# Altium PCB RevolvingStageController.PcbDoc
Units mil, origin at the board's own origin, x right, y up, seen from the top; angles counter-clockwise.
Board outline 2766.03 x 2766.03 mil, 2 copper layers (Top Layer, Bottom Layer); 41 components, 32 nets, 182 pads, 22 vias.
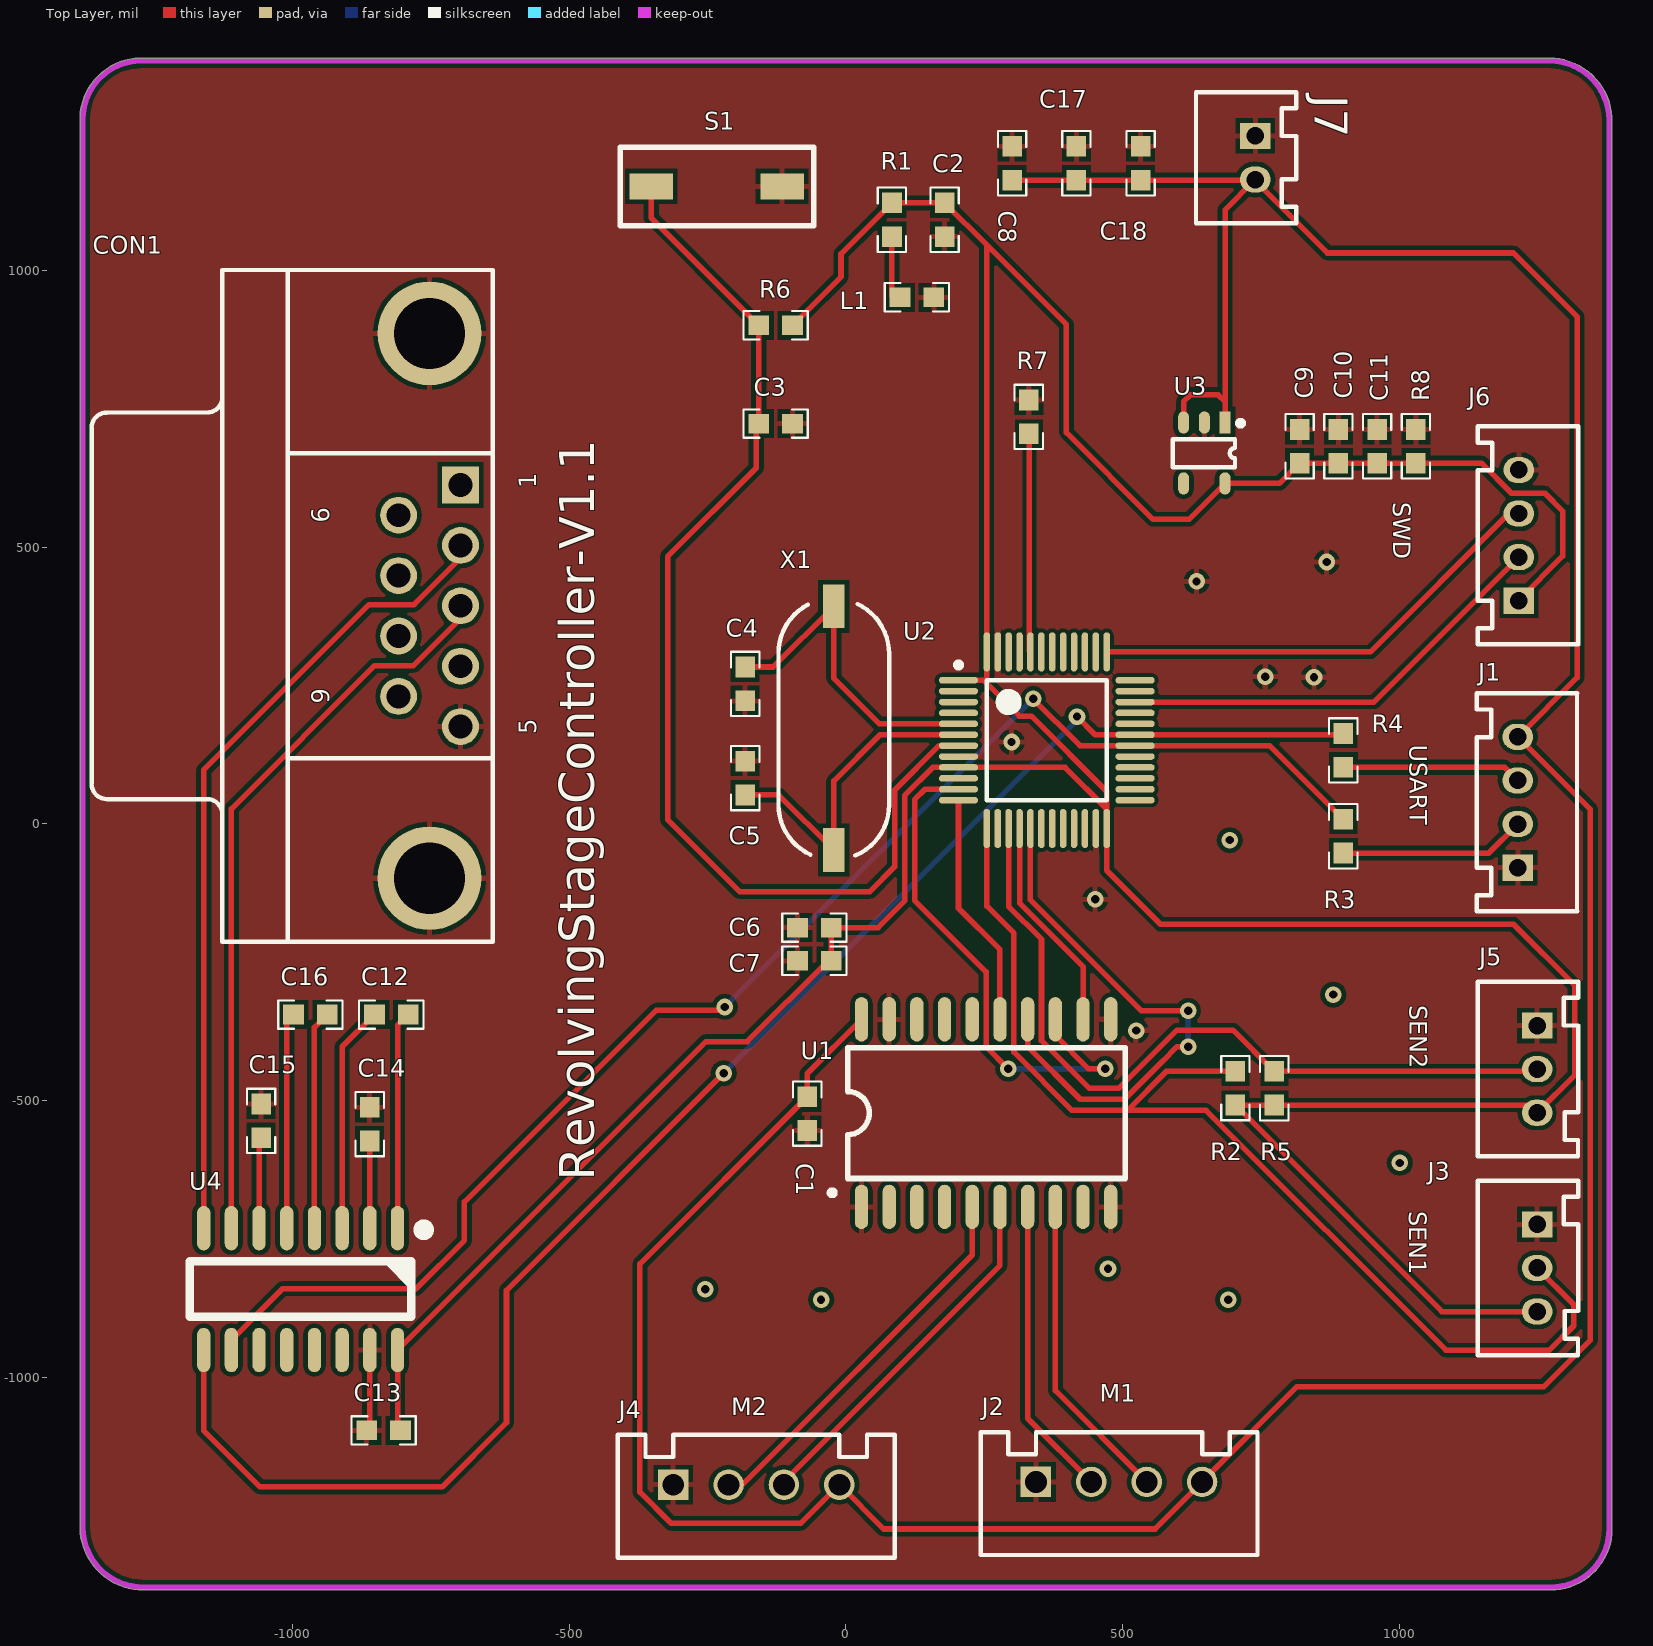
[diagram p0: Top Layer view]
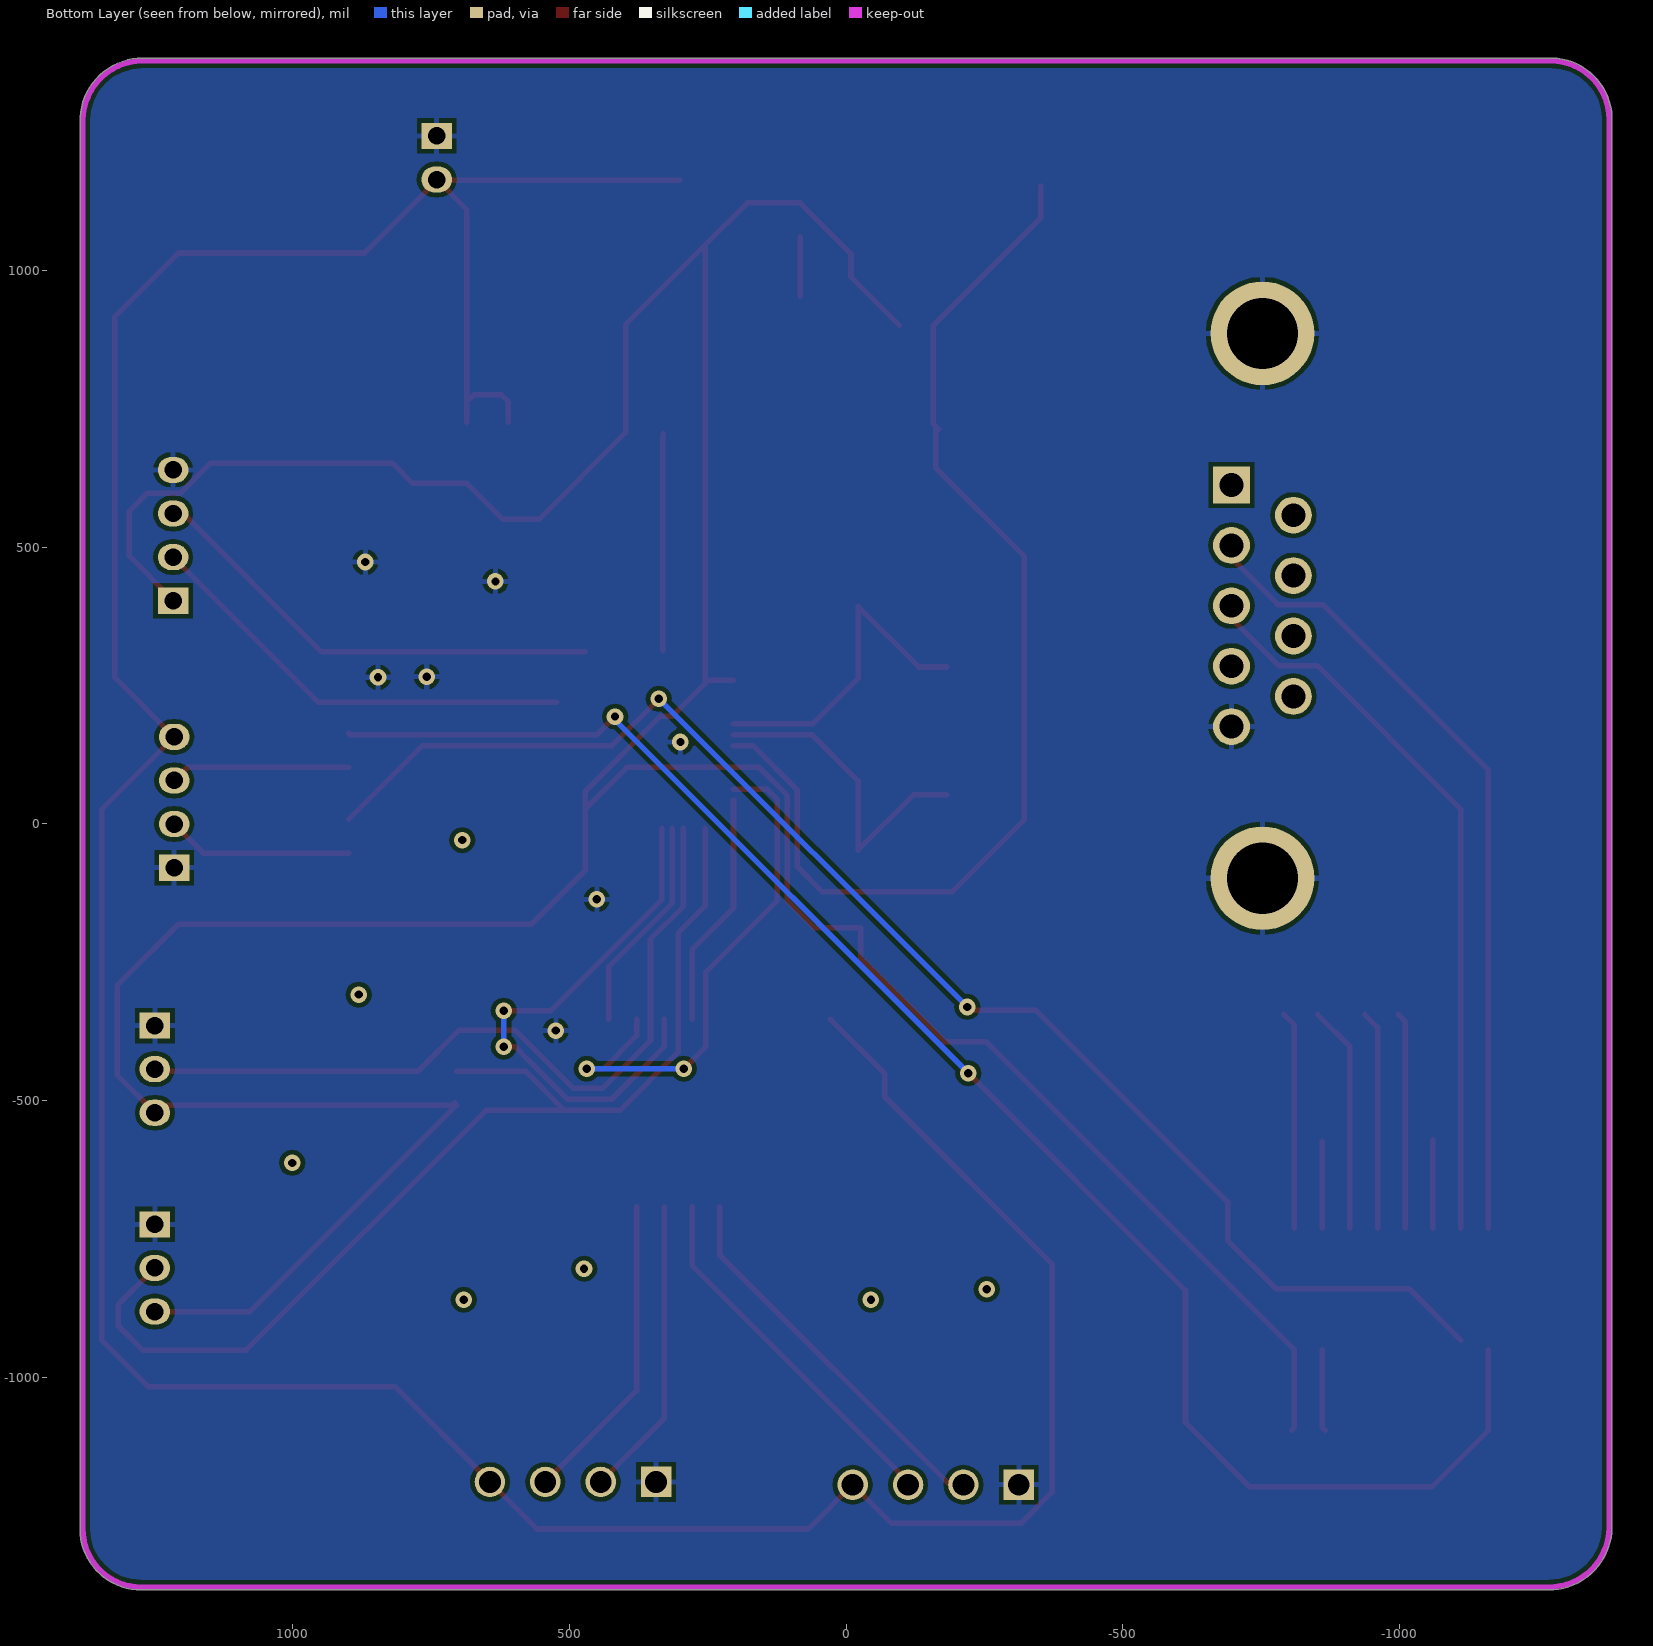
[diagram p1: Bottom Layer view, seen from below]

## Layer stack, top to bottom
Top Layer: signal copper 1.4
Dielectric: dielectric 12.6, FR-4, Dk 4.8
Bottom Layer: signal copper 1.4

## Board outline
-1383.01,-1277 -1383.01,-1270.04 ccw(c-1378,-1270) -1383.01,-1270.05 -1383.01,-1270.04 -1383.01,-1269.96 -1382.97,1271.27 cw(c-1378,1271.95) -1383.01,1271.93 cw(c-1272.5,1272.45) -1382.97,1275.72 -1382.97,1283 cw(c-1377.95,1283) -1382.23,1285.62 cw(c-1272.5,1272.45) -1274.39,1382.95 cw(c-1274,1377.95) -1274,1382.97 1270.27,1382.97 cw(c1270.95,1378) 1271.01,1383.01 cw(c1269.78,1269.83) 1273.26,1382.97 1277,1382.97 cw(c1277,1377.95) 1278.71,1382.67 cw(c1269.78,1269.83) 1382.85,1275.07 cw(c1377.95,1274) 1382.97,1274 1382.97,-1271.31 cw(c1378,-1272) 1383.01,-1271.97 cw(c1272.73,-1272.73) 1383.02,-1272.73 cw(c1272.73,-1272.73) 1271.98,-1383.01 -1267.31,-1382.97 cw(c-1268,-1378) -1267.95,-1383.01 cw(c-1269,-1269) -1382.58,-1279.05 cw(c-1378,-1277)

## Design rules (kind name [scope] priority, off if disabled: settings)
Clearance mcu [InComponent('U2')] p1: gap=7
Clearance Clearance_1 [All] p2: gap=8
ComponentClearance [All] p1: gap=0 collisioncheckmode=3 verticalgap=0 showdistances=FALSE
HoleSize [All] p1: absolutevalues=TRUE maxlimit=200 minlimit=1 maxpercent=80.000 minpercent=20.000
MinimumSolderMaskSliver [All] p1: minsoldermaskwidth=5
PolygonConnect [All] p1: connectstyle=Relief reliefconductorwidth=10 reliefentries=4 polygonreliefangle="90 Angle"
RoutingVias [All] p1: holewidth=15 width=30 viastyle="Through Hole" minholewidth=2 minwidth=5 maxholewidth=15 maxwidth=30
SilkscreenOverComponentPads [All] p1: minsilkscreentomaskgap=5
SolderMaskExpansion [All] p1: expansion=4
Width [All] p1: maxlimit=20 minlimit=10 preferedwidth=10
24 further rules are at their usual default settings.

## Components (designator, comment, footprint, x,y, rotation, side; value= is the part's Value field where it differs from the comment)
C1 "0.1uF" 0603 -70,-523 r270 top
C2 "0.1uF" 0603 178,1091 r270 top
C3 "0.1uF" 0603 -127,723 r0 top
C4 "20pF" 0603 -182,253 r90 top
C5 "20pF" 0603 -182,83 r270 top
C6 "1uF" 0603 -57,-187 r180 top
C7 "0.1uF" 0603 -57,-247 r180 top
C8 "10uF" 0603 300,1193 r270 top
C9 "10uF" 0603 819,682 r90 top
C10 "10uF" 0603 889,682 r270 top
C11 "0.1uF" 0603 959,682 r270 top
C12 "1uF" 0603 -821,-344 r180 top
C13 "1uF" 0603 -835,-1095 r0 top
C14 "1uF" 0603 -860,-542 r270 top
C15 "1uF" 0603 -1056,-536 r270 top
C16 "1uF" 0603 -967,-344 r0 top
C17 "10uF" 0603 416,1193 r270 top
C18 "0.1uF" 0603 532,1193 r270 top
CON1 "RS232" DSUB1.385-2H9-M -1126,394 r90 top
J1 "PH2.0-4P" PH2.0-4P 1213,118 r90 top
J2 "XH2.54-4P" XH2.54-4 393,-1188 r0 top
J3 "PH2.0-3P" PH2.0-3P 1248,-841 r270 top
J4 "XH2.54-4P" XH2.54-4 -262,-1193 r0 top
J5 "PH2.0-3P" PH2.0-3P 1247.9,-482 r270 top
J6 "PH2.0-4P" PH2.0-4P 1215,600 r90 top
J7 "PH2.0-2P" PH2.0-2P 739,1203 r270 top
L1 "LED" 0603 128,951 r0 top
R1 "1K" 0603 83,1091 r90 top
R2 "10K" 0603 703,-477 r90 top
R3 "10R" 0603 898,-22 r90 top
R4 "10R" 0603 898,133 r90 top
R5 "10K" 0603 773.31,-477.04 r90 top
R6 "10K" 0603 -127,900.48 r180 top
R7 "10K" 0603 330,735 r270 top
R8 "1K" 0603 1029,682 r270 top
S1 "SW-PB" SW-KEY -391,1222 r0 top
U1 "SOP-20" SOP-20 253,-522 r90 top
U2 "LQFP48_N" LQFP48_N 362.57,151.31 r0 top
U3 "XC6503D331" SOT23-5 647,670 r270 top
U4 "MAX3232ESE" SOIC-16N -983,-840 r270 top
X1 "8M" HC-49SMD -22,173 r90 top

## Footprints (in the part's own frame and the unit in brackets; to place one, negate y for a bottom-side part, rotate by r counter-clockwise, add the part's x,y. Pads: shape width x height; smd on the part's side, far side on the other; paste and mask are expansions set on the pad)
0603 [mm]
  rect 0.95x0.9 smd: 1(-0.775,0) 2(0.775,0)
  silkscreen extent -1.48,-0.65 1.47,0.65
DSUB1.385-2H9-M [mm] "Connector; D Subminiature; 9 Position; Right Angle; P"
  rect 1.69x1.69 hole 1.09: 1(5.54,-10.92)
  round 1.69 hole 1.09: 2(2.77,-10.92) 3(0,-10.92) 4(-2.77,-10.92) 5(-5.54,-10.92) 6(4.155,-8.08) 7(1.385,-8.08) 8(-1.385,-8.08) 9(-4.155,-8.08)
  round 4.76 hole 3.26: 10(-12.495,-9.5) 11(12.495,-9.5)
  silkscreen extent -15.4,-12.4 15.4,6
HC-49SMD [mm]
  rect 2x1 smd: 1(-5.588,0) 2(5.588,0)
  silkscreen extent -5.84,-2.54 5.7,2.54
LQFP48_N [mm]
  oval 1.8x0.3 smd: 1(-4.05,2.75) 2(-4.05,2.25) 3(-4.05,1.75) 4(-4.05,1.25) 5(-4.05,0.75) 6(-4.05,0.25) 7(-4.05,-0.25) 8(-4.05,-0.75) 9(-4.05,-1.25) 10(-4.05,-1.75) 11(-4.05,-2.25) 12(-4.05,-2.75) 25(4.05,-2.75) 26(4.05,-2.25) 27(4.05,-1.75) 28(4.05,-1.25) 29(4.05,-0.75) 30(4.05,-0.25) 31(4.05,0.25) 32(4.05,0.75) 33(4.05,1.25) 34(4.05,1.75) 35(4.05,2.25) 36(4.05,2.75)
  oval 0.3x1.8 smd: 13(-2.75,-4.05) 14(-2.25,-4.05) 15(-1.75,-4.05) 16(-1.25,-4.05) 17(-0.75,-4.05) 18(-0.25,-4.05) 19(0.25,-4.05) 20(0.75,-4.05) 21(1.25,-4.05) 22(1.75,-4.05) 23(2.25,-4.05) 24(2.75,-4.05) 37(2.75,4.05) 38(2.25,4.05) 39(1.75,4.05) 40(1.25,4.05) 41(0.75,4.05) 42(0.25,4.05) 43(-0.25,4.05) 44(-0.75,4.05) 45(-1.25,4.05) 46(-1.75,4.05) 47(-2.25,4.05) 48(-2.75,4.05)
  silkscreen extent -4.17,-2.75 2.75,3.57
PH2.0-2P [mm]
  rect 1.2x1.4 hole 0.8: 1(-1,0)
  oval 1.2x1.4 hole 0.8: 2(1,0)
  silkscreen extent -3.01,-2.72 3,1.88
PH2.0-3P [mm]
  rect 1.2x1.4 hole 0.8: 1(-3,0)
  oval 1.2x1.4 hole 0.8: 2(-1,0) 3(1,0)
  silkscreen extent -5,-2.72 3,1.88
PH2.0-4P [mm]
  rect 1.2x1.4 hole 0.8: 1(-5,0)
  oval 1.2x1.4 hole 0.8: 2(-3,0) 3(-1,0) 4(1,0)
  silkscreen extent -7.01,-2.72 3,1.88
SOIC-16N [mil]
  oval 80x24 smd: 1(-110.24,173.23) 2(-110.24,123.23) 3(-110.24,73.23) 4(-110.24,23.23) 5(-110.24,-26.77) 6(-110.24,-76.77) 7(-110.24,-126.77) 8(-110.24,-176.77) 9(109.76,-176.77) 10(109.76,-126.77) 11(109.76,-76.77) 12(109.76,-26.77) 13(109.76,23.23) 14(109.76,73.23) 15(109.76,123.23) 16(109.76,173.23)
  silkscreen extent -116,-202 50,229
SOP-20 [mil]
  oval 80x24 smd: 1(-169.29,225) 2(-169.29,175) 3(-169.29,125) 4(-169.29,75) 5(-169.29,25) 6(-169.29,-25) 7(-169.29,-75) 8(-169.29,-125) 9(-169.29,-175) 10(-169.29,-225) 11(169.29,-225) 12(169.29,-175) 13(169.29,-125) 14(169.29,-75) 15(169.29,-25) 16(169.29,25) 17(169.29,75) 18(169.29,125) 19(169.29,175) 20(169.29,225)
  silkscreen extent -149,-251 118,283
SOT23-5 [mil] "SOT23,"
  rect 40x20 smd: 1(-55,37.4)
  oval 40x20 smd: 2(-55,0) 3(-55,-37.4) 4(55,-37.4) 5(55,37.4)
  silkscreen extent -59,-57 26,70
SW-KEY [mm] "RESET?"
  rect 2x1.2 smd: 1(1,-1.8) 2(7,-1.8)
  silkscreen extent -0.43,-3.6 8.45,0
XH2.54-4 [mm]
  rect 1.4x1.4 hole 1: 1(-1.27,0)
  round 1.4 hole 1: 2(1.27,0) 3(3.81,0) 4(6.35,0)
  silkscreen extent -3.81,-3.35 8.89,2.29

## Part data
C1 C2 C3 C4 C5 C6 C7 C8 C9 C10 C11 C12 C13 C14 C15 C16: library part Cap, "Capacitor"
C17 C18: library part Cap
CON1: library part "D Connector 9", "Receptacle Assembly, 9 Position, Right Angle"
J1 J2 J4 J6: library part "Header 4", "Header, 4-Pin"
J3 J5: library part "Header 3", "Header, 3-Pin"
R1 R2 R3 R4 R5 R6 R7 R8: library part Res1, "Resistor"
S1: "Switch"
U1: library part 74HC245
U2: library part STM32F030C8T6, "STM32 ARM-based 32-bit MCU with 64 Kbytes Flash, 48-pin LQFP, Industrial Tempe"
U3: library part XC6503Dxxx
X1: library part XTAL

## Via types
v1: diameter 30, hole 15, Top Layer to Bottom Layer, tented both sides, 22 vias

## Nets (pads, with @x,y where several pads share a name; then routed paths per layer and width w, separated by ;. In a path a pad name is that pad's centre, name@x,y a point inside that pad or via, vN(x,y) a via of type N, cw(c..) or ccw(c..) an arc to the next point about the centre after c; other vN are vias at no path point)
3.3V: C2.1 C6.1 C7.1 C9.1 C10.2 C11.2 C13.2 J3.3 J5.3 J6.1 R1.2 R2.1 R5.1 R6.1 R8.2 U2.1 U2.9 U2.24 U2.48 U3.5 U4.16 | length 7893.3
  Top Layer w10: C13.2 -809.77,-1089.72 U4.16 -253.01,-393 -178.71,-393 -32.71,-247 C7.1 C6.1 58,-187 106,-139 106,51.46 156.64,102.09 U2.9 395.76,102.09 U2.24@470.83,27.02 ; R6.1 -9,987.97 -9,1029.51 R1.2 C2.1 254.3,1045.21 ; U2.1 248.43,259.57 254.3,253.7 ; R2.1 1075.86,-880.37 J3.3 ; R2.1@706.76,-503.76 710.51,-507.51 773.27,-507.51 R5.1 1234.08,-507.55 J5.3 1316,-453.27 1316,-292 1205,-181 567.99,-181 470.83,-83.84 U2.24 U2.24@470.83,27.02 ; J6.1 1215,404.71 1294,483.71 1294,565 1261.75,597.25 1201.39,597.25 1147.15,651.49 R8.2 C11.2 C10.2 C9.1 782.51,615 U3.5 619.4,550 554.51,550 397.76,706.76 397.76,901.76 254.3,1045.21 ; 254.3,253.7 313.05,194.95 334.95,194.95 470.83,59.06 U2.24@470.83,27.02 ; 254.3,253.7 U2.48 254.3,1045.21
5V: C1.1 C8.2 C17.2 C18.2 J1.4 J2.4 J4.4 J7.2 U1.20 U3.1 U3.3 | length 6741.6
  Top Layer w10: U1.20 -70,-450.71 C1.1 -372,-794.49 -372,-1206.5 -315.5,-1263 -82,-1263 J4.4 68,-1273 558,-1273 J2.4 ; C8.2 C17.2 C18.2 J7.2@737.86,1162.49 ; U3.3 609.6,762.6 622,775 672,775 684.4,762.6 ; U3.1 684.4,762.6 ; 733,-1098 J2.4 ; J2.4 642.49,-1187.49 813.98,-1016 1260,-1016 1344,-932 1344,26.37 J1.4 1320,264.37 1320,916 1205,1031 869.35,1031 J7.2@737.86,1162.49 ; 684.4,762.6 684.4,1109.03 J7.2@737.86,1162.49
GND: C1.2 C2.2 C3.2 C4.1 C5.1 C6.2 C7.2 C8.1 C9.2 C10.1 C11.1 C13.1 C14.1 C15.1 C17.1 C18.1 CON1.5 CON1.10 CON1.11 J1.1 J2.1 J3.1 J4.1 J5.1 J6.4 J7.1 L1.2 R7.1 R8.1 S1.2 U1.1 U1.10 U1.11 U1.19 U2.8 U2.23 U2.47 U3.2 U4.15 | length 147.6
  Top Layer w10: C13.1 -859.77,-1089.26 U4.15
  other v1: 524,-373 450,-136 299,148 845,265 757,266 633,438 868,473
NetC4_2: C4.2 U2.5 X1.2 | length 594.5
  Top Layer w10: C4.2 -131.49,283.51 X1.2 -22,263 60.17,180.83 U2.5
NetC5_2: C5.2 U2.6 X1.1 | length 585.7
  Top Layer w10: C5.2 -121.49,52.49 X1.1 -22,77.83 61.31,161.15 U2.6
NetC12_1: C12.1 U4.1 | length 393.8
  Top Layer w10: U4.1 -809.77,-363.28 C12.1
NetC12_2: C12.2 U4.3 | length 409.9
  Top Layer w10: U4.3 -909.77,-402.26 C12.2
NetC14_2: C14.2 U4.2 | length 157
  Top Layer w10: U4.2@-860,-729.54 C14.2
NetC15_2: C15.2 U4.6 | length 159.5
  Top Layer w10: U4.6 C15.2@-1059.77,-570.28
NetC16_1: C16.1 U4.5 | length 390.8
  Top Layer w10: U4.5 -1009.77,-356.26 C16.1
NetC16_2: C16.2 U4.4 | length 395.4
  Top Layer w10: U4.4 -959.77,-367.28 C16.2
NetCON1_2: CON1.2 U4.8 | length 1464.2
  Top Layer w10: U4.8 -1159.77,97.23 -861,396 -780,396 -696.08,479.92 CON1.2@-696.08,494.91
NetCON1_3: CON1.3 U4.7 | length 1328
  Top Layer w10: U4.7 -1109.77,27.23 -851,286 -781,286 -696.08,370.92 CON1.3@-696.08,385.85
NetJ1_2: J1.2 R3.1 | length 336.7
  Top Layer w10: R3.1 1160.6,-52.51 J1.2
NetJ1_3: J1.3 R4.1 | length 324.9
  Top Layer w10: R4.1 1189.14,102.49 J1.3
NetJ2_2: J2.2 U1.7 | length 544.3
  Top Layer w10: U1.7 328,-1073 J2.2
NetJ2_3: J2.3 U1.8 | length 565.1
  Top Layer w10: U1.8 378,-1023 J2.3
NetJ4_2: J4.2 U1.5 | length 695.6
  Top Layer w10: J4.2 J4.2@-190,-1193 ; J4.2@-187,-1193 228,-778 U1.5
NetJ4_3: J4.3 U1.6 | length 657.3
  Top Layer w10: J4.3@-112,-1187 278,-797 U1.6
NetL1_1: L1.1 R1.1 | length 107.2
  Top Layer w10: L1.1@83,953.24 R1.1
NetR7_2: R7.2 U2.44 | length 392.5
  Top Layer w10: R7.2 331.26,703.23 U2.44@331.26,312.54
RST: C3.1 R6.2 S1.1 U2.7 | length 2060.2
  Top Layer w10: S1.1 -351.63,1094.6 R6.2 C3.1 ; C3.1@-167.51,713 C3.1@-162,712 ; C3.1@-162,718.51 -162,643 -322,483 -322,8 -192,-122 43,-122 88,-77 88,61.51 167.95,141.46 U2.7
SWCLK: J6.3 U2.37 | length 847.7
  Top Layer w10: U2.37 946.76,310.76 1196.63,560.63 J6.3
SWDIO: J6.2 U2.34 | length 801.4
  Top Layer w10: U2.34 953.31,220.2 J6.2
UART1RX: R4.2 U2.31 U4.9 | length 2979.7
  Top Layer w10: U4.9 -1159.77,-1095.23 -1058,-1197 -729,-1197 -613,-1081 -613,-842 v1(-221,-450) ; v1(417,194) 449.85,161.15 U2.31 895.64,161.15 R4.2
  Bottom Layer w10: v1(-221,-450) 417,188 v1(417,194)
UART1TX: R3.2 U2.30 U4.10 | length 2609.7
  Top Layer w10: U4.10@-1109.77,-931.77 -1017,-839 -776,-839 -689,-752 -689,-682.4 -343,-336.4 v1@-225,-336.4 ; v1(338,226) 422.54,141.46 U2.30 765.05,141.46 R3.2
  Bottom Layer w10: v1(-219,-330.4) 337.4,226 v1(338,226)
信号1: J3.2 R2.2 U2.13 | length 2032.9
  Top Layer w10: U2.13 254.3,-148.3 303,-197 303,-412 408,-517 508,-517 ; R2.2 578.51,-446.49 508,-517 ; J3.2 1314,-867.63 1314,-906 1270,-950 1083,-950 650,-517 508,-517
  Bottom Layer w10: J3.2@1246.27,-809 J3.2@1246.9,-809.63
信号2: J5.2 R5.2 U2.15 | length 1414
  Top Layer w10: U2.15 293.67,-148.58 353,-207.91 353,-391.06 438.94,-477 493,-477 598,-372 698.78,-372 R5.2 1244,-446.53 J5.2
电机1PWM: U1.12 U2.16 | length 392.1
  Top Layer w10: U2.16 313.35,-142.81 428,-257.46 U1.12
电机1方向: U1.13 U2.11 | length 967
  Top Layer w10: U2.11 142.72,62.72 124,44 124,-138 253,-267 253,-402 v1(293,-442) ; U1.13 378,-382 438,-442 v1(468,-442) v1@473,-442
  Bottom Layer w10: v1(293,-442) v1(468,-442)
电机2PWM: U1.14 U2.17 | length 979.7
  Top Layer w10: U1.14 328,-402 423,-497 502.54,-497 571.06,-428.49 571.51,-428.49 598,-402 v1(618,-402) ; U2.17 333.04,-137.04 533,-337 v1(618,-337)
  Bottom Layer w10: v1(618,-402) v1(618,-337)
电机2方向: U1.15 U2.12 | length 426.8
  Top Layer w10: U2.12 203.12,-152.12 278,-227 U1.15
pads on no net: CON1.1 CON1.4 CON1.6 CON1.7 CON1.8 CON1.9 U1.2 U1.3 U1.4 U1.9 U1.16 U1.17 U1.18 U2.2 U2.3 U2.4 U2.10 U2.14 U2.18 U2.19 U2.20 U2.21 U2.22 U2.25 U2.26 U2.27 U2.28 U2.29 U2.32 U2.33 U2.35 U2.36 U2.38 U2.39 U2.40 U2.41 U2.42 U2.43 U2.45 U2.46 U3.4 U4.11 U4.12 U4.13 U4.14
copper on no net:
  other v1: -45,-859 690,-859 -254,-840 473,-803 1000,-612 880,-308 693,-29

## Polygon pours and split planes (outlines as drawn)
GND on Top Layer "Top Layer-No Net" (solid, remove dead copper, pour order 4): -1666,1639 -1666,-1550 1508,-1550 1593,-1635 1507,-1549 1507,1662
GND on Bottom Layer "Top Layer-No Net" (solid, remove dead copper, pour order 6): -1720,1677 -1720,-1698 -1674,-1744 1453,-1744 1453,1646 1461,1654

## Keep-outs
Keep-Out Layer:
  lines w10: -1378,-1277 -1377.95,1283 ; -1378,-1270 ccw(c-1269,-1269) -1268,-1378 ; -1378,1271.95 cw(c-1272.5,1272.45) -1273,1377.95 ; -1274,1377.95 1277,1377.95 ; -1268,-1377.95 1273,-1378 ; 1270.95,1378 cw(c1269.78,1269.83) 1377.95,1271 ; 1272,-1378 ccw(c1272.73,-1272.73) 1378,-1272 ; 1377.95,-1273 1377.95,1274

## Silkscreen, mask and mechanical layers (free items; w line width, h text height)
Top Overlay:
  text "SWD" at 988,581 h31.5 r270
  text "USART" at 1018,143 h31.5 r270
  text "SEN2" at 1018,-327 h31.5 r270
  text "RevolvingStageController-V1.1" at -455,-644 h62.99 r90
  text "SEN1" at 1017,-699 h31.5 r270
  text "M1" at 458,-1043 h31.5
  text "M2" at -207,-1068 h31.5
Drill Drawing:
  text ".LEGEND" at 1579,-1413 h60
  text "Drill Drawing." at 1584,-1543 h60

## Text inside footprints (layer, text, board x,y; h text height)
CON1: Top Overlay "6" at -933.09,543.61 h31.5 r90; Top Overlay "9" at -933.09,216.83 h31.5 r90; Top Overlay "5" at -559.07,161.72 h31.5 r90; Top Overlay "1" at -559.07,606.6 h31.5 r90